# Altium PCB 核心_PCB.PcbDoc
Units mil, origin at the board's own origin, x right, y up, seen from the top; angles counter-clockwise.
Board outline 1740 x 2100 mil, 2 copper layers (Top Layer, Bottom Layer); 41 components, 35 nets, 179 pads, 18 vias.
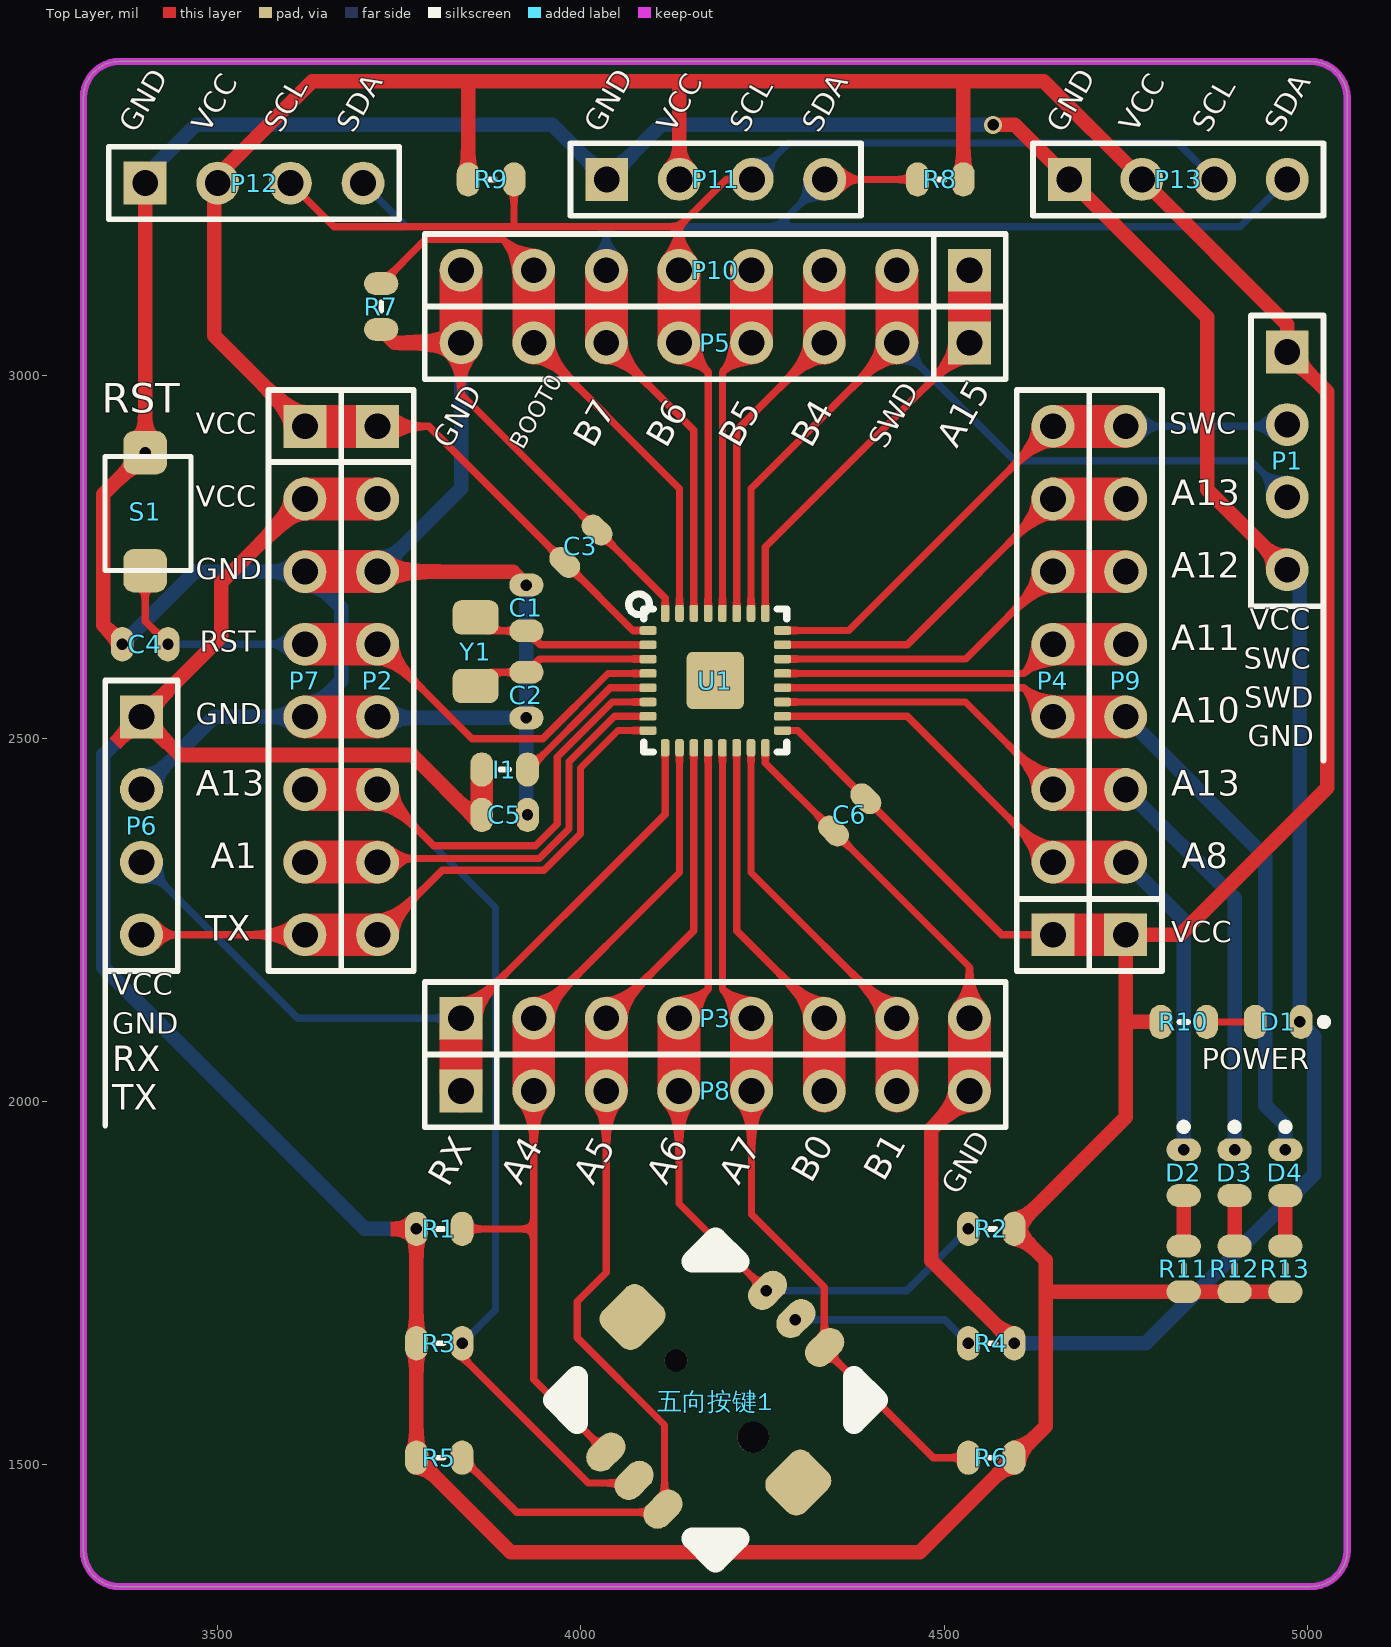
[diagram p0: Top Layer view]
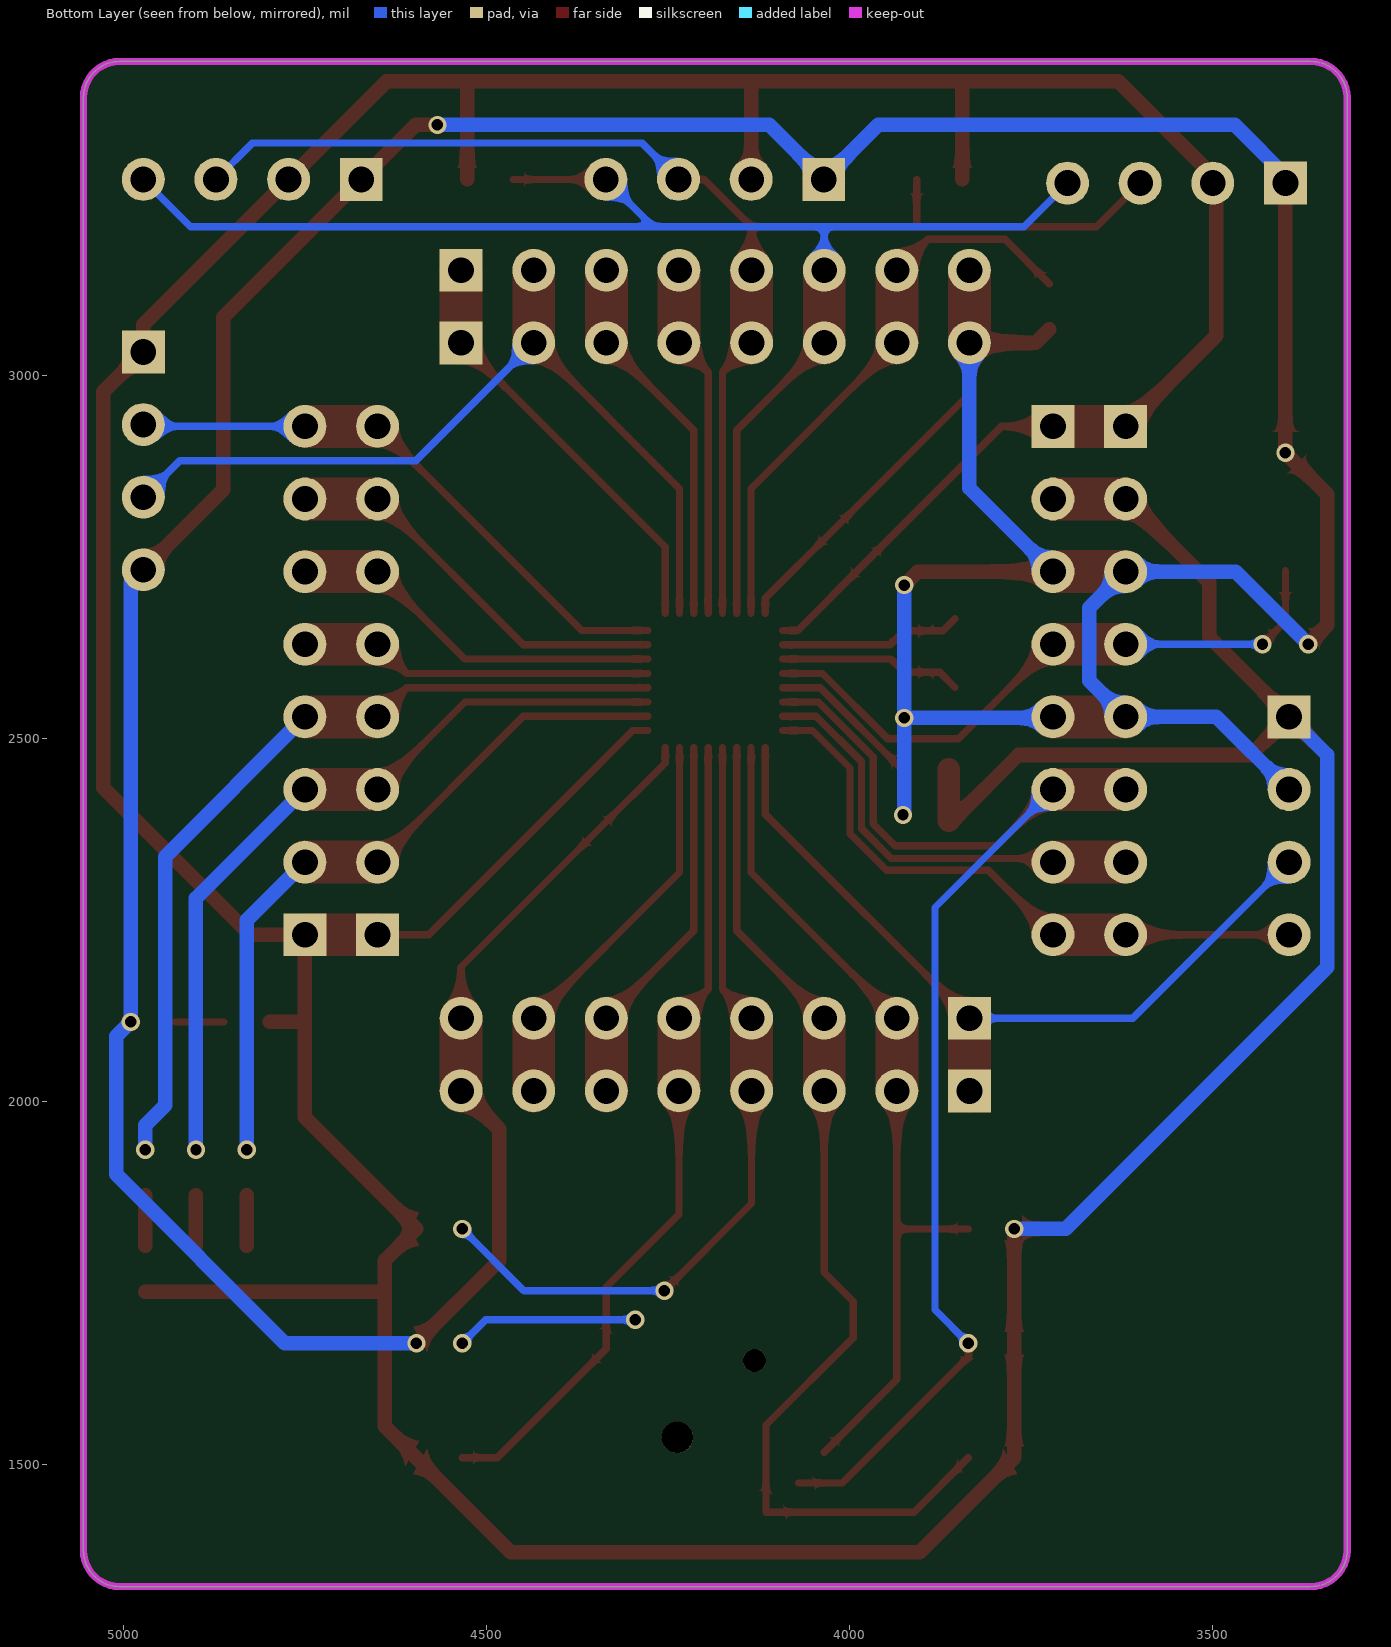
[diagram p1: Bottom Layer view, seen from below]
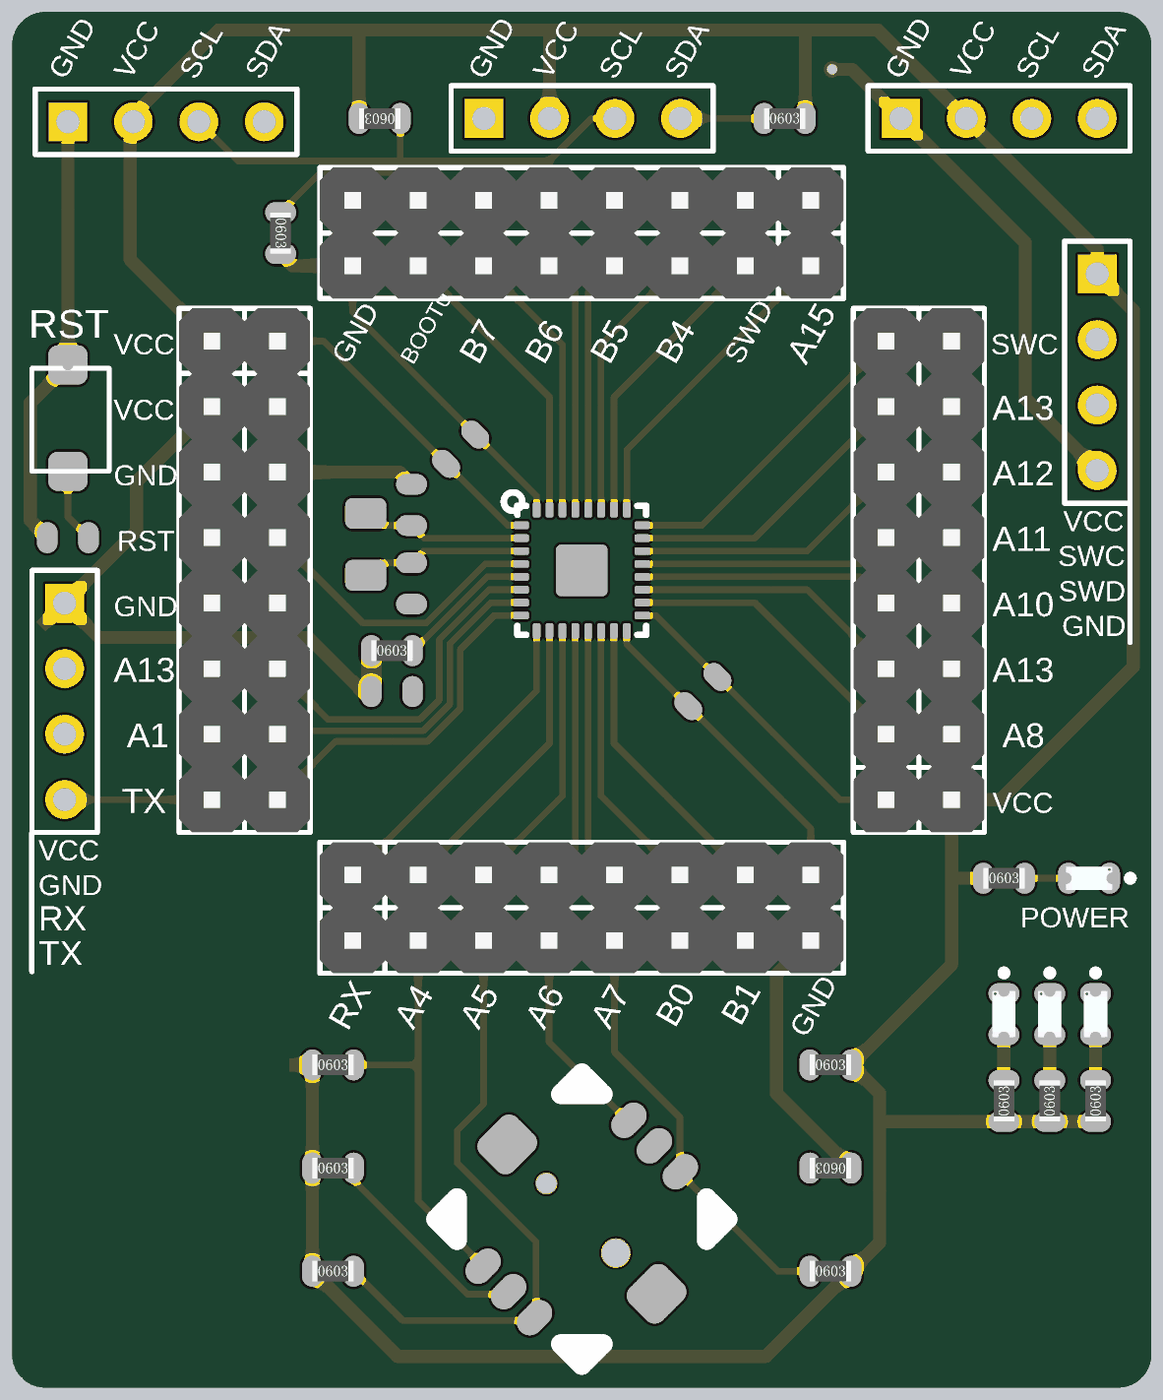
[diagram p2: 3D render of the assembled board from above, using the file's embedded part models]

## Layer stack, top to bottom
Top Solder: solder mask 0.4, Solder Resist, Dk 3.5
Top Layer: signal copper 1.4
Dielectric 1: dielectric 12.6, FR-4, Dk 4.8
Bottom Layer: signal copper 1.4
Bottom Solder: solder mask 0.4, Solder Resist, Dk 3.5

## Board outline
3315,1382.5 3315,3382.5 cw(c3365,3382.5) 3365,3432.5 5005,3432.5 cw(c5005,3382.5) 5055,3382.5 5055,1382.5 cw(c5005,1382.5) 5005,1332.5 3365,1332.5 cw(c3365,1382.5)

## Design rules (kind name [scope] priority, off if disabled: settings)
Clearance [All] p1: gap=6
MinimumSolderMaskSliver [All] p1: minsoldermaskwidth=0
PolygonConnect [All] p1: connectstyle=Relief reliefconductorwidth=10 reliefentries=4 polygonreliefangle="90 Angle" airgapwidth=10
RoutingVias [All] p1: holewidth=28 width=50 viastyle="Through Hole" minholewidth=1 minwidth=1 maxholewidth=999 maxwidth=999
SilkToSilkClearance [All] p1: silktosilkclearance=0
SilkToSolderMaskClearance [IsPad] p1: minsilkscreentomaskgap=0 clearancetoexposedcopper=TRUE
SolderMaskExpansion [All] p1: expansion=4
Width [All] p1: maxlimit=999 minlimit=10 preferedwidth=10
27 further rules are at their usual default settings.

## Components (designator, comment, footprint, x,y, rotation, side; value= is the part's Value field where it differs from the comment)
C1 "4.3pF" 1__0603-CAP_ 3925,2680 r90 top
C2 "4.3pF" 1__0603-CAP_ 3925,2560 r270 top
C3 "104" 1__0603-CAP_ 4000,2765 r45 top
C4 "100nF" 1__0603-CAP_ 3400,2630 r0 top
C5 "104" 1__0603-CAP_ 3895,2395 r0 top
C6 "104" 1__0603-CAP_ 4370,2395 r225 top
D1 "LED" 1__0603-LED_ 4960,2110 r0 top
D2 "LED" 1__0603-LED_ 4830,1902.5 r90 top
D3 "LED" 1__0603-LED_ 4900,1902.5 r90 top
D4 "LED" 1__0603-LED_ 4970,1902.5 r90 top
I1 "100uH" 1__0603_Ind_ 3895,2457.5 r0 top
P1 "" HDR1X4 4972.5,3032.5 r270 top
P2 "Header 8" HDR1X8 3720,2930 r270 top
P3 "Header 8" HDR1X8 3835,2115 r0 top
P4 "Header 8" HDR1X8 4650,2230 r90 top
P5 "Header 8" HDR1X8 4535,3045 r180 top
P6 "蓝牙" HDR1X4 3395,2530 r270 top
P7 "Header 8" HDR1X8 3620,2930 r270 top
P8 "Header 8" HDR1X8 3835,2015 r0 top
P9 "Header 8" HDR1X8 4750,2230 r90 top
P10 "Header 8" HDR1X8 4535,3145 r180 top
P11 "" HDR1X4 4035.64,3270 r0 top
P12 "" HDR1X4 3400,3265 r0 top
P13 "" HDR1X4 4672.5,3270 r0 top
R1 "220K" 1__0603-RES_ 3805,1825 r0 top
R2 "220K" 1__0603-RES_ 4565,1825 r0 top
R3 "220K" 1__0603-RES_ 3805,1667.5 r0 top
R4 "330" 1__0603-RES_ 4565,1667.5 r180 top
R5 "220K" 1__0603-RES_ 3805,1510 r0 top
R6 "220K" 1__0603-RES_ 4565,1510 r0 top
R7 "10K" 1__0603-RES_ 3725,3095 r270 top
R8 "220K" 1__0603-RES_ 4495,3270 r0 top
R9 "220K" 1__0603-RES_ 3876.27,3270 r180 top
R10 "4K7" 1__0603-RES_ 4830,2110 r0 top
R11 "4K7" 1__0603-RES_ 4830,1770 r90 top
R12 "4K7" 1__0603-RES_ 4900,1770 r90 top
R13 "4K7" 1__0603-RES_ 4970,1770 r90 top
S1 "" key3*4*2 3400,2812.5 r270 top
U1 "STM32L432Kx" STM32L432 4185,2580 r0 top
Y1 "32.768K" OSC32 3854.53,2572.38 r90 top
五向按键1 "五向按键" 1__五向按键_ 4185.2,1589.56 r45 top

## Footprints (in the part's own frame and the unit in brackets; to place one, negate y for a bottom-side part, rotate by r counter-clockwise, add the part's x,y. Pads: shape width x height; smd on the part's side, far side on the other; paste and mask are expansions set on the pad)
1__0603-CAP_ [mm]
  oval 0.8x1.2 smd: 1(-0.8,0) 2(0.8,0)
  body extent -0.88,-0.48 0.87,0.48, height 0.85
1__0603-LED_ [mm]
  oval 0.8x1.2 smd: 1(-0.8,0) 2(0.8,0)
  silkscreen extent 1.48,-0.12 1.73,0.12, body extent -0.9,-0.45 0.9,0.45, height 0.8
1__0603-RES_ [mm]
  oval 0.8x1.2 smd: 1(-0.8,0) 2(0.8,0)
  silkscreen extent -0.15,0 0.15,0, body extent -0.8,-0.4 0.8,0.4, height 0.45
1__0603_Ind_ [mm]
  oval 0.8x1.2 smd: 1(-0.8,0) 2(0.8,0)
  silkscreen extent -0.15,0 0.15,0, body extent -0.8,-0.4 0.8,0.4, height 0.45
1__五向按键_ [mm]
  rrect50% 2x1.8 smd: 0(0,4.096) 0(0.004,-4.096)
  round 1.1 hole 1.1: 0(0.004,-1.861)
  round 0.8 hole 0.8: 0(0.004,1.949)
  oval 1.524x1 smd: 1(-4,1.419) 2(-4.001,0.022) 3(-4.001,-1.403) 4(4,1.419) 5(4.001,0.022) 6(4.001,-1.403)
  silkscreen extent -4,-4 4,4
HDR1X4 [mm] "Connector; Header; 4 Position"
  rect 1.5x1.5 hole 0.9: 1(0,0)
  round 1.5 hole 0.9: 2(2.54,0) 3(5.08,0) 4(7.62,0)
  silkscreen extent -1.27,-1.27 8.89,1.27
HDR1X8 [mm] "Connector; Header; 8 Position"
  rect 1.5x1.5 hole 0.9: 1(0,0)
  round 1.5 hole 0.9: 2(2.54,0) 3(5.08,0) 4(7.62,0) 5(10.16,0) 6(12.7,0) 7(15.24,0) 8(17.78,0)
  silkscreen extent -1.27,-1.27 19.05,1.27, body extent -1.27,-1.27 19.05,1.27, height 8.54
key3*4*2 [mil]
  rrect50% 60x60 smd: 1(-81.24,0) 2(81.24,0)
  silkscreen extent -76,-55 81,63
OSC32 [mm]
  rrect50% 1.2x1.6 smd: 1(0.003,-0.012) 2(2.403,-0.012)
STM32L432 [mm]
  rrect20% 2x2 smd: 0(0,0)
  rrect50% 0.6x0.3 smd: 1(-2.35,1.75) 2(-2.35,1.25) 3(-2.35,0.75) 4(-2.35,0.25) 5(-2.35,-0.25) 6(-2.35,-0.75) 7(-2.35,-1.25) 8(-2.35,-1.75) 17(2.35,-1.75) 18(2.35,-1.25) 19(2.35,-0.75) 20(2.35,-0.25) 21(2.35,0.25) 22(2.35,0.75) 23(2.35,1.25) 24(2.35,1.75)
  rrect50% 0.3x0.6 smd: 9(-1.75,-2.35) 10(-1.25,-2.35) 11(-0.75,-2.35) 12(-0.25,-2.35) 13(0.25,-2.35) 14(0.75,-2.35) 15(1.25,-2.35) 16(1.75,-2.35) 25(1.75,2.35) 26(1.25,2.35) 27(0.75,2.35) 28(0.25,2.35) 29(-0.25,2.35) 30(-0.75,2.35) 31(-1.25,2.35) 32(-1.75,2.35)
  silkscreen extent -3.02,-2.5 2.5,3.03

## Part data
C1 C2 C3 C4 C5 C6: library part Cap, "Capacitor"
D1 D2 D3 D4: library part LED0, "Typical INFRARED GaAs LED"
I1: library part 电感
P1 P6 P11 P12 P13: library part "Header 4", "Header, 4-Pin"
P2 P3 P4 P5 P7 P8 P9 P10: "Header, 8-Pin"
R1 R2 R3 R4 R5 R6 R7 R8 R9 R10 R11 R12 R13: library part Res2, "Resistor"
S1: library part SW-PB, "Switch"
U1: "单片机"
Y1: library part XTAL, "Crystal Oscillator"

## Via types
v1: diameter 25.2, hole 15.75, Top Layer to Bottom Layer, tented both sides, 18 vias

## Nets (pads, with @x,y where several pads share a name; then routed paths per layer and width w, separated by ;. In a path a pad name is that pad's centre, name@x,y a point inside that pad or via, vN(x,y) a via of type N, cw(c..) or ccw(c..) an arc to the next point about the centre after c; other vN are vias at no path point)
BOOT0: P5.7 P10.7 R7.1 U1.31 | length 808.5
  Top Layer w10: R7.1 3786,3187.5 3892.5,3187.5 P10.7 ; P5.7 4135.79,2844.21 U1.31
  Top Layer w59.05: P5.7 P10.7
GND: C1.2 C2.2 C3.2 C4.1 C5.2 C6.2 D1.2 P1.4 P2.3 P2.5 P3.8 P5.8 P6.2 P7.3 P7.5 P8.8 P10.8 P11.1 P12.1 P13.1 R4.1 R7.2 S1.1 U1.16 U1.32 | length 7908.2
  Top Layer w10: P12.1@3395,3270 P12.1 ; P5.8 3835,2974.54 C3.2 4116.1,2693.44 U1.32 ; U1.16 4253.9,2466.56 C6.2 4535,2185.46 P3.8
  Top Layer w20: v1(3368.5,2630) 3342.5,2656 3342.5,2836.24 v1(3400,2893.74) P12.1 ; P2.3 3906.5,2730 v1(3925,2711.5) ; R7.2 3743.5,3045 P5.8 ; P8.8 4482.5,1962.5 4482.5,1781.5 v1(4596.5,1667.5) ; v1(4567.5,3345) 4597.5,3345 P13.1 4862.5,3080 4862.5,2842.5 P1.4
  Top Layer w59.05: P7.5 P2.5 ; P7.3 P2.3 ; P5.8 P10.8 ; P8.8 P3.8
  Bottom Layer w10: P2.5 P2.5@3721.5,2528.5
  Bottom Layer w20: v1(3368.5,2630) 3468.5,2730 P7.3 3670,2680 3670,2580 P7.5 3495,2530 P6.2 ; P12.1@3395,3270 3470,3345 3960.64,3345 P11.1 4110.64,3345 v1(4567.5,3345) ; P2.3 3835,2845 P5.8 ; P2.5@3721.5,2528.5 v1(3925,2528.5) ; v1@3925,2395 v1(3925,2528.5) ; v1(3925,2711.5) v1(3925,2528.5) ; v1(4596.5,1667.5) 4777.5,1667.5 5010,1900 5010,2090 v1(4990,2110) 4990,2715 P1.4
  other v1: 3926.5,2395
KEY-Down: P3.4 P8.4 R2.1 U1.12 五向按键1.4 | length 1127.5
  Top Layer w10: P8.4 4135,1860 v1(4255,1740) ; P3.4 4175.16,2155.16 U1.12
  Top Layer w59.05: P8.4 P3.4
  Bottom Layer w10: v1(4255,1740) 4448.5,1740 v1(4533.5,1825)
KEY-Left: P3.2 P8.2 R1.2 U1.10 五向按键1.1 | length 1193.1
  Top Layer w10: R1.2 3935,1825 ; P8.2 3935,1825 ; P3.2 4135.79,2315.79 U1.10 ; 五向按键1.1@4035,1517.5 3935,1617.5 3935,1825
  Top Layer w59.05: P8.2 P3.2
KEY-Right: P3.5 P8.5 R6.1 U1.13 五向按键1.6 | length 1146.2
  Top Layer w10: U1.13 4194.84,2155.16 P3.5 ; P8.5 4235,1845 4335,1745 4335,1660 4485,1510 R6.1
  Top Layer w59.05: P8.5 P3.5
KEY-Up: P3.3 P8.3 R5.2 U1.11 五向按键1.3 | length 1478.2
  Top Layer w10: R5.2 3911.5,1435 4115,1435 4115,1555 3995,1675 3995,1725 4035,1765 P8.3 ; P3.3 4155.47,2235.47 U1.11
  Top Layer w59.05: P8.3 P3.3
NetD1_1: D1.1 R10.2 | length 67
  Top Layer w10: R10.2 D1.1
NetD2_1: D2.1 R11.2 | length 69.5
  Top Layer w20: R11.2 D2.1
NetD3_1: D3.1 R12.2 | length 69.5
  Top Layer w20: R12.2 D3.1
NetD4_1: D4.1 R13.2 | length 69.5
  Top Layer w20: R13.2 D4.1
NetR4_2: R4.2 五向按键1.5 | length 252
  Bottom Layer w10: v1(4295,1700) 4501,1700 v1(4533.5,1667.5)
NRST: C4.2 P2.4 P7.4 S1.2 U1.4 | length 866.4
  Top Layer w10: S1.2 3400,2661.5 v1(3431.5,2630) ; P2.4 3850,2500 3947.5,2500 4037.34,2589.84 U1.4
  Top Layer w59.05: P7.4 P2.4
  Bottom Layer w10: v1(3431.5,2630) P7.4
OSC32-IN: C1.1 U1.2 Y1.2 | length 252.3
  Top Layer w10: Y1.2@3855,2665 3871.5,2648.5 C1.1 3944.29,2629.21 U1.2
OSC32-OUT: C2.1 U1.3 Y1.1 | length 253.6
  Top Layer w10: Y1.1@3855,2570.51 3875.98,2591.5 C2.1 3943.03,2609.53 U1.3
PA1: P2.7 P7.7 U1.7 | length 609.7
  Top Layer w10: P2.7 3725,2335 3942.63,2335 3983.5,2375.87 3983.5,2468.12 4046.17,2530.79 U1.7
  Top Layer w59.05: P7.7 P2.7
PA8: D2.2 P4.2 P9.2 U1.18 | length 984.8
  Top Layer w10: U1.18 4449.21,2530.79 P4.2
  Top Layer w59.05: P4.2 P9.2
  Bottom Layer w20: P9.2 4830,2250 v1(4830,1934)
PA9: D3.2 P4.3 P9.3 U1.19 | length 1080.5
  Top Layer w10: U1.19 4529.53,2550.47 P4.3
  Top Layer w59.05: P4.3 P9.3
  Bottom Layer w20: P9.3 4900,2280 v1(4900,1934)
PA10: D4.2 P4.4 P9.4 U1.20 | length 1176.2
  Top Layer w10: U1.20 4609.84,2570.16 P4.4
  Top Layer w59.05: P4.4 P9.4
  Bottom Layer w20: P9.4 4942.5,2337.5 4942.5,1995 4970,1967.5 v1(4970,1934)
PA11: P4.5 P9.5 U1.21 | length 489.1
  Top Layer w10: U1.21 4609.84,2589.84 P4.5
  Top Layer w59.05: P4.5 P9.5
PA12: P4.6 P9.6 U1.22 | length 522.4
  Top Layer w10: U1.22 4529.53,2609.53 P4.6
  Top Layer w59.05: P4.6 P9.6
PA13: P4.7 P9.7 U1.23 | length 555.6
  Top Layer w10: U1.23 4449.21,2629.21 P4.7
  Top Layer w59.05: P4.7 P9.7
PA15: P5.1 P10.1 U1.25 | length 588.9
  Top Layer w10: U1.25 4253.9,2763.9 P5.1
  Top Layer w59.05: P5.1 P10.1
PB0: P3.6 P8.6 U1.14 | length 522.4
  Top Layer w10: U1.14 4214.53,2235.47 P3.6
  Top Layer w59.05: P8.6 P3.6
PB1: P3.7 P8.7 U1.15 | length 555.6
  Top Layer w10: U1.15 4234.21,2315.79 P3.7
  Top Layer w59.05: P8.7 P3.7
PB4: P5.3 P10.3 U1.27 | length 522.4
  Top Layer w10: U1.27 4214.53,2924.53 P5.3
  Top Layer w59.05: P5.3 P10.3
PB5: P5.4 P10.4 U1.28 | length 489.1
  Top Layer w10: U1.28 4194.84,3004.84 P5.4
  Top Layer w59.05: P5.4 P10.4
PB6: P5.5 P10.5 P11.3 P12.3 P13.3 R9.1 U1.29 | length 1987
  Top Layer w10: P12.3@3595,3270 3660,3205 3907.5,3205 ; R9.1 3907.77,3205.27 3907.5,3205 ; P5.5 4175.16,3004.84 U1.29 ; P10.5 4135,3205 ; P11.3 4200,3270 4135,3205 ; 3907.5,3205 4135,3205
  Top Layer w59.05: P5.5 P10.5
  Bottom Layer w10: P11.3 4285.64,3320 4822.5,3320 P13.3
PB7: P5.6 P10.6 P11.4 P12.4 P13.4 R8.1 U1.30 | length 2133.5
  Top Layer w10: P5.6 4155.47,2924.53 U1.30 ; P11.4 R8.1
  Top Layer w59.05: P5.6 P10.6
  Bottom Layer w10: P12.4@3695,3270 3760,3205 4035,3205 ; P10.6 4035,3205 ; P11.4 4270.64,3205 ; P13.4 4907.5,3205 4270.64,3205 ; 4035,3205 4270.64,3205
SWCLK: P1.2 P4.8 P9.8 U1.24 | length 812.5
  Top Layer w10: U1.24 4368.9,2648.9 P4.8 ; P1.2@4970,2930 P1.2
  Top Layer w59.05: P4.8 P9.8
  Bottom Layer w10: P9.8 P1.2@4970,2930
SWDIO: P1.3 P5.2 P10.2 U1.26 | length 1181.2
  Top Layer w10: U1.26 4234.21,2844.21 P5.2
  Top Layer w59.05: P5.2 P10.2
  Bottom Layer w10: P5.2 4597.5,2882.5 4922.5,2882.5 P1.3
UART-RX: P3.1 P6.3 P8.1 U1.9 | length 1118
  Top Layer w10: P3.1 4116.1,2396.1 U1.9
  Top Layer w59.05: P8.1 P3.1
  Bottom Layer w10: P6.3 3610,2115 P3.1
UART-TX: P2.8 P6.4 P7.8 U1.8 | length 866.8
  Top Layer w10: P6.4 P7.8 ; P2.8 3809,2319 3949.25,2319 3999.5,2369.25 3999.5,2459.5 4051.1,2511.1 U1.8
  Top Layer w59.05: P7.8 P2.8
VCC: C3.1 C5.1 C6.1 I1.1 P1.1 P2.1 P2.2 P4.1 P6.1 P7.1 P7.2 P9.1 P11.2 P12.2 P13.2 R1.1 R2.2 R3.1 R5.1 R6.2 R8.2 R9.2 R10.1 R11.1 R12.1 R13.1 U1.1 U1.17 | length 9151.3
  Top Layer w10: P2.1 3790.46,2930 C3.1 4071.56,2648.9 U1.1 ; 3844.77,3404.77 3845,3405 ; 4135,3405 4135.64,3404.36 ; U1.17 4298.44,2511.1 C6.1 4579.54,2230 P4.1 ; 4526.5,3404 4527.5,3405 ; 4640,1740 4641.5,1738.5
  Top Layer w20: P7.2 3505,2715 3505,2640 P6.1 3447.5,2477.5 3767.5,2477.5 3857.5,2387.5 C5.1@3863.5,2387.5 ; P7.1 3495,3055 3495,3270 3630,3405 3845,3405 4135,3405 4527.5,3405 4637.5,3405 P13.2 4972.5,3070 P1.1 5027.5,2977.5 5027.5,2432.5 4825,2230 P9.1 4750,2110 ; v1(3773.5,1825) R3.1 R5.1 3903.5,1380 4466.5,1380 R6.2 4640,1553.5 4640,1740 4640,1781.5 R2.2 4750,1978.5 4750,2110 ; R9.2 3844.77,3404.77 ; P11.2 4135.64,3404.36 ; R8.2 4526.5,3404 ; 4641.5,1738.5 R11.1 R12.1 R13.1 ; R10.1 4750,2110
  Top Layer w31.5: C5.1@3863.5,2387.5 C5.1 I1.1
  Top Layer w59.05: P7.2 P2.2 ; P7.1 P2.1 ; P4.1 P9.1
  Bottom Layer w20: P6.1 3342.5,2477.5 3342.5,2185 3702.5,1825 v1(3773.5,1825)
VDDA: I1.2 U1.5 | length 212.3
  Top Layer w10: I1.2@3927.06,2456.93 4040.28,2570.16 U1.5
WK-UP: P2.6 P7.6 R3.2 U1.6 五向按键1.2 | length 1813.9
  Top Layer w10: P2.6 3797.5,2352.5 3937.5,2352.5 3967.5,2382.5 3967.5,2474.75 4043.23,2550.47 U1.6 ; v1(3836.5,1667.5) 3836.5,1648.5 4010,1475 五向按键1.2@4070,1475
  Top Layer w59.05: P7.6 P2.6
  Bottom Layer w10: P2.6 3882.5,2267.5 3882.5,1713.5 v1(3836.5,1667.5)
pads on no net: U1.0 五向按键1.0

## Keep-outs
Keep-Out Layer:
  lines w10: 3315,1382.5 ccw(c3365,1382.5) 3365,1332.5 5005,1332.5 ccw(c5005,1382.5) 5055,1382.5 5055,3382.5 ccw(c5005,3382.5) 5005,3432.5 3365,3432.5 ccw(c3365,3382.5) 3315,3382.5 3315,2985 3315,1382.5

## Silkscreen, mask and mechanical layers (free items; w line width, h text height)
Top Overlay:
  lines w8: 3345,1967.5 3345,2180 ; 5022.5,2470 5022.5,2682.5
  text "GND" at 3395,3327.5 h50 r60
  text "VCC" at 3495,3327.5 h50 r60
  text "SCL" at 3595,3327.5 h50 r60
  text "SDA" at 3695,3327.5 h50 r60
  text "GND" at 4035.64,3327.5 h50 r60
  text "VCC" at 4135.64,3327.5 h50 r60
  text "SCL" at 4235.64,3327.5 h50 r60
  text "SDA" at 4335.64,3327.5 h50 r60
  text "GND" at 4672.5,3327.5 h50 r60
  text "VCC" at 4772.5,3327.5 h50 r60
  text "SCL" at 4872.5,3327.5 h50 r60
  text "SDA" at 4972.5,3327.5 h50 r60
  text "RST" at 3340,2935 h70
  text "VCC" at 3470,2910 h50
  text "SWC" at 4810,2910 h50
  text "GND" at 3827.5,2892.5 h50 r60
  text "BOOT0" at 3927.5,2892.5 h40 r60
  text "B7" at 4027.5,2892.5 h60 r60
  text "B6" at 4127.5,2892.5 h60 r60
  text "B5" at 4227.5,2892.5 h60 r60
  text "B4" at 4327.5,2892.5 h60 r60
  text "SWD" at 4427.5,2892.5 h50 r60
  text "A15" at 4527.5,2892.5 h60 r60
  text "VCC" at 3470,2810 h50
  text "A13" at 4812.5,2810 h60
  text "GND" at 3470,2710 h50
  text "A12" at 4812.5,2710 h60
  text "VCC" at 4920.6,2640 h50
  text "RST" at 3475,2610 h50
  text "A11" at 4812.5,2610 h60
  text "SWC" at 4912.5,2586.85 h50
  text "SWD" at 4913.13,2533.15 h50
  text "GND" at 3470,2510 h50
  text "A10" at 4812.5,2510 h60
  text "GND" at 4918.5,2480 h50
  text "A13" at 3470,2410 h60
  text "A13" at 4812.5,2410 h60
  text "A1" at 3490,2310 h60
  text "A8" at 4827.5,2310 h60
  text "TX" at 3482.5,2210 h60
  text "VCC" at 4812.5,2210 h50
  text "VCC" at 3355.05,2137.5 h50
  text "GND" at 3355,2084.35 h50
  text "POWER" at 4855,2035 h50
  text "RX" at 3355,2030.65 h60
  text "TX" at 3355,1977.5 h60
  text "B1" at 4427.5,1882.5 h60 r60
  text "B0" at 4327.5,1880 h60 r60
  text "A4" at 3927.5,1877.5 h60 r60
  text "A5" at 4027.5,1877.5 h60 r60
  text "A6" at 4127.5,1877.5 h60 r60
  text "A7" at 4227.5,1877.5 h60 r60
  text "RX" at 3827.5,1875 h60 r60
  text "GND" at 4527.5,1865 h50 r60